# Altium PCB PCB3_factory.PcbDoc (part 1 of 3)
Units mil, origin at the board's own origin, x right, y up, seen from the top; angles counter-clockwise.
Board outline 1614.17 x 4094.49 mil, 2 copper layers (Top Layer, Bottom Layer); 17 components, 26 nets, 94 pads, 20 vias.
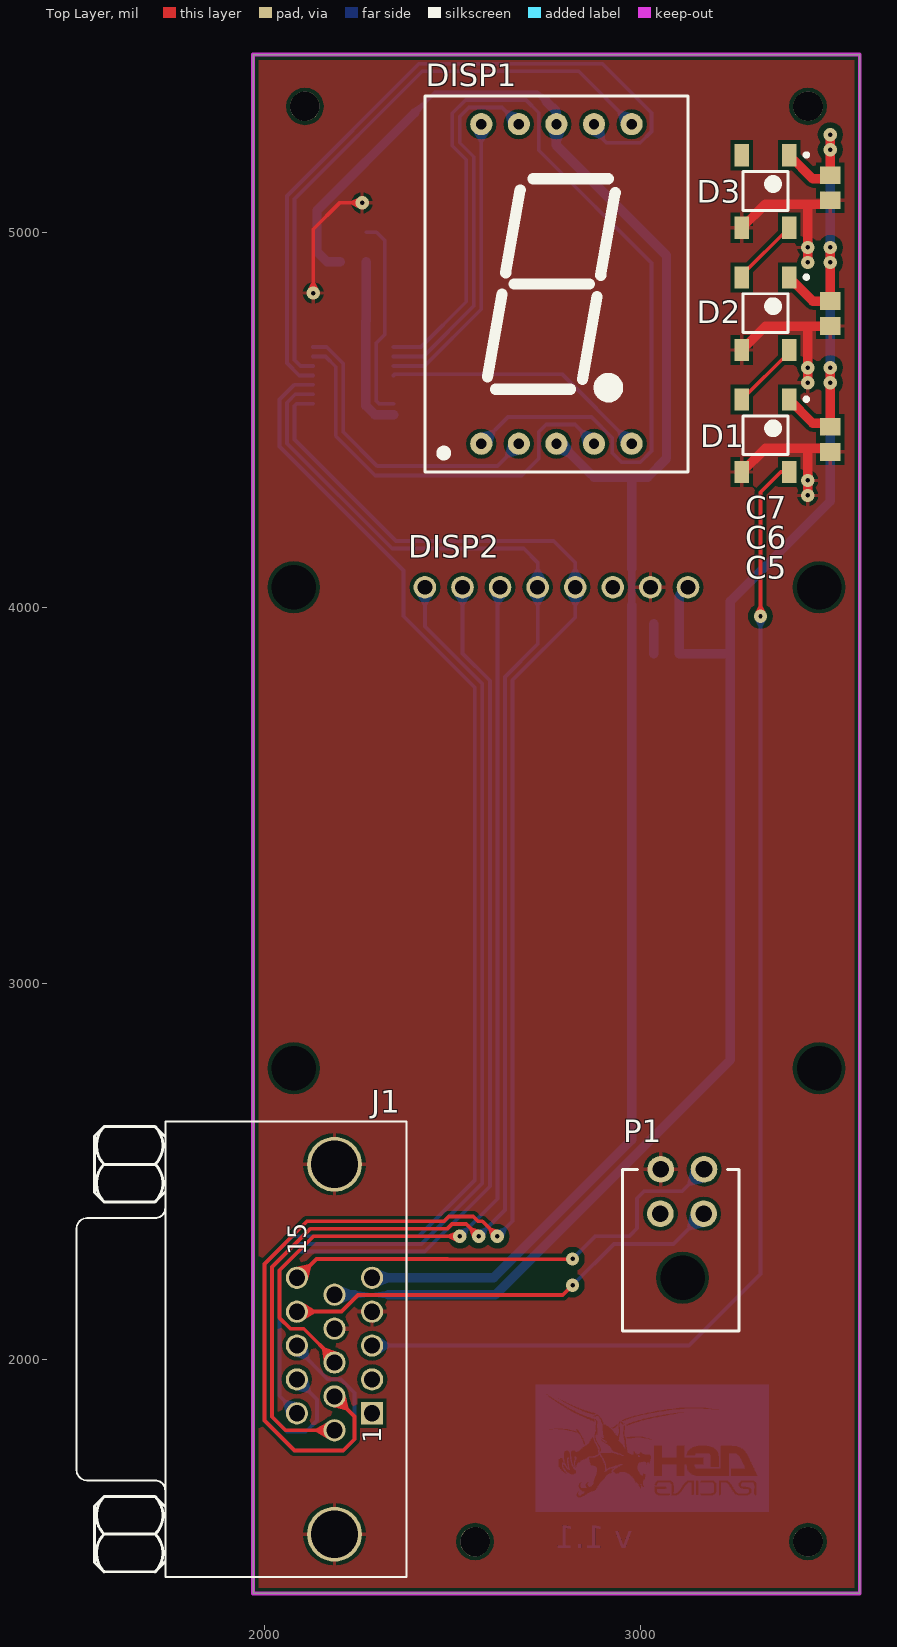
[diagram p0: Top Layer view]
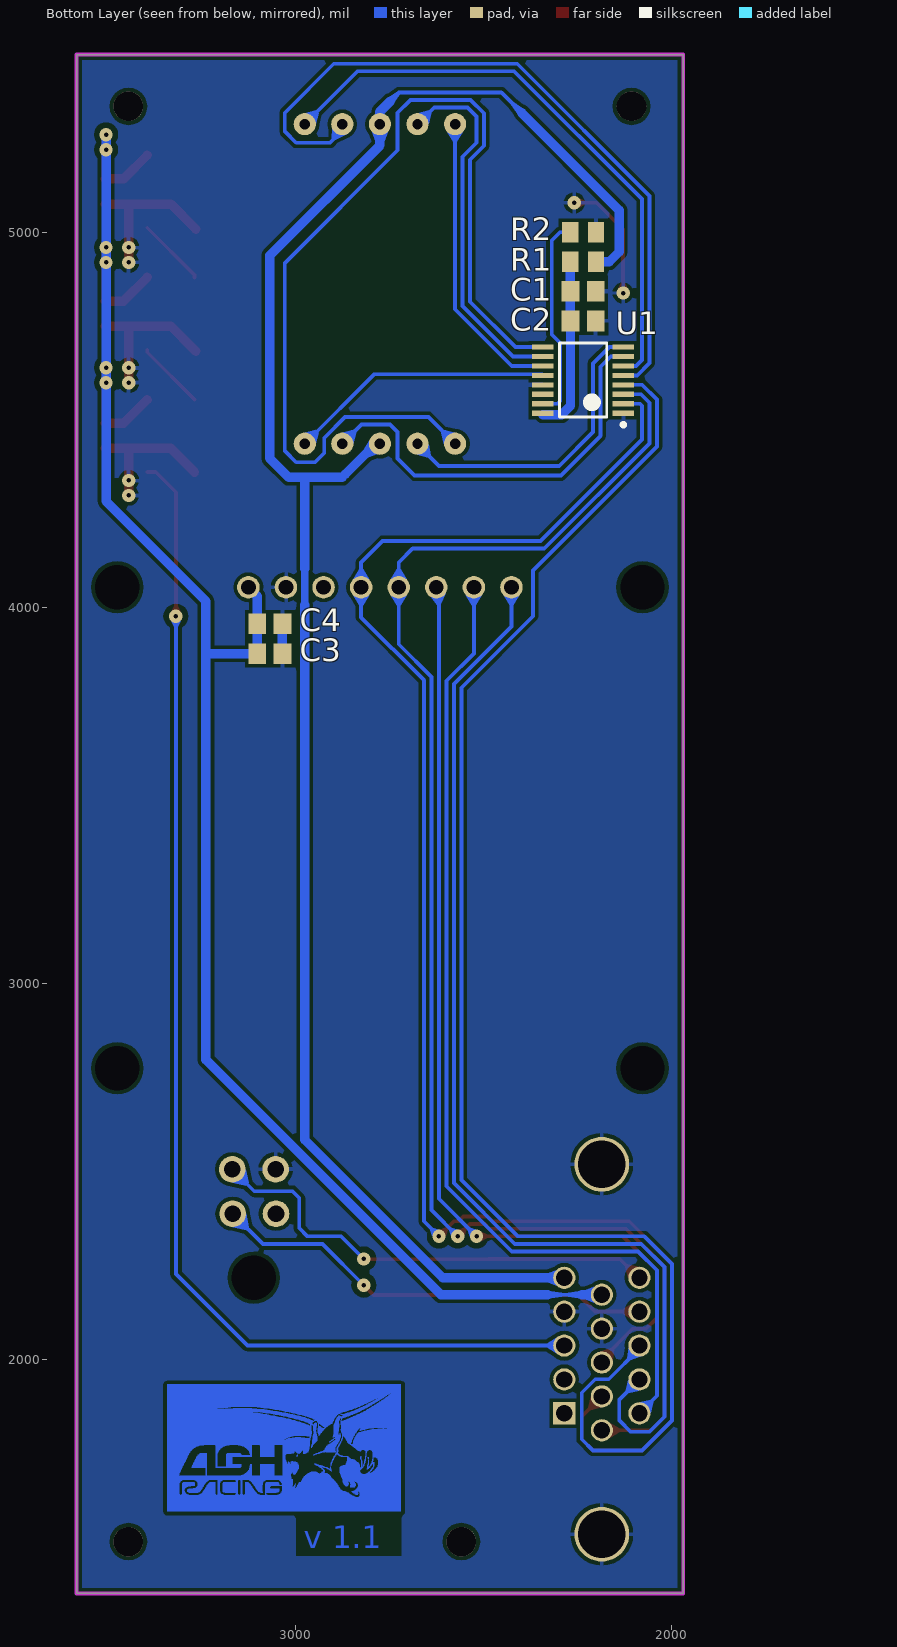
[diagram p1: Bottom Layer view, seen from below]
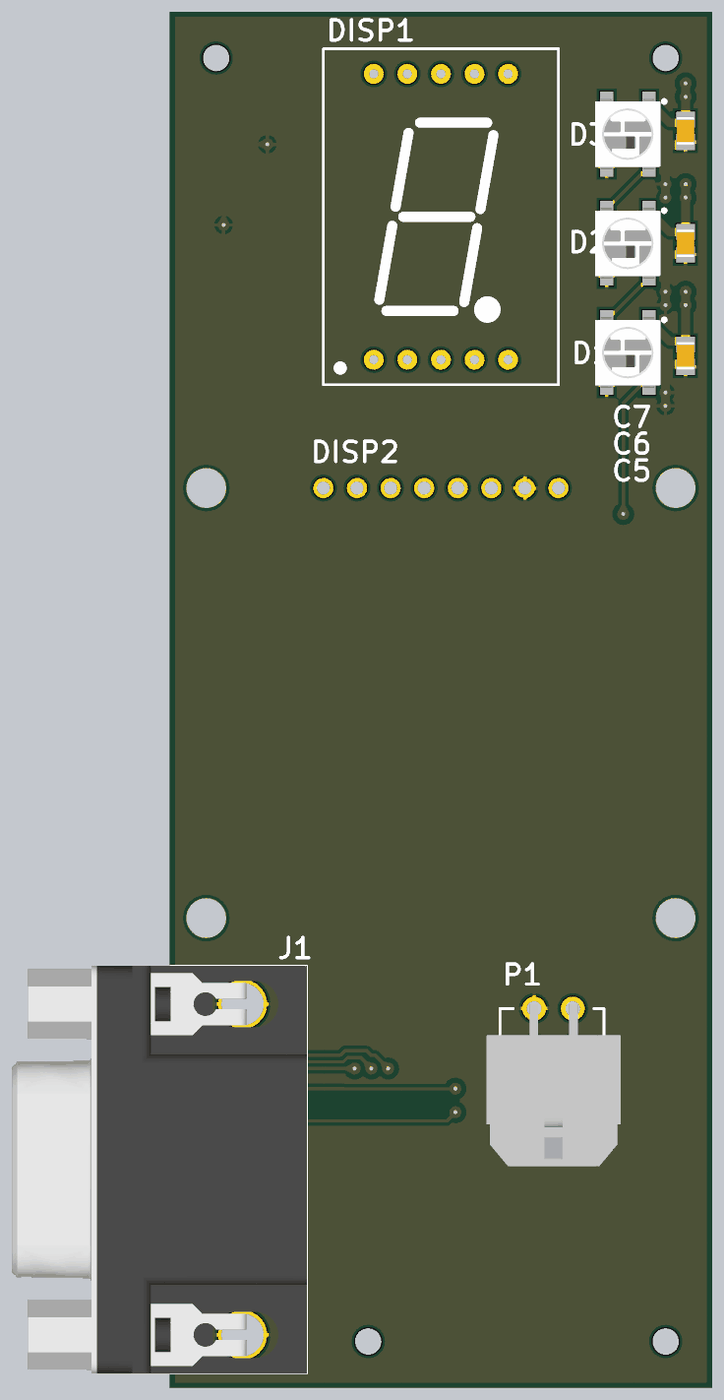
[diagram p4: 3D render of the assembled board from above, using the file's embedded part models]
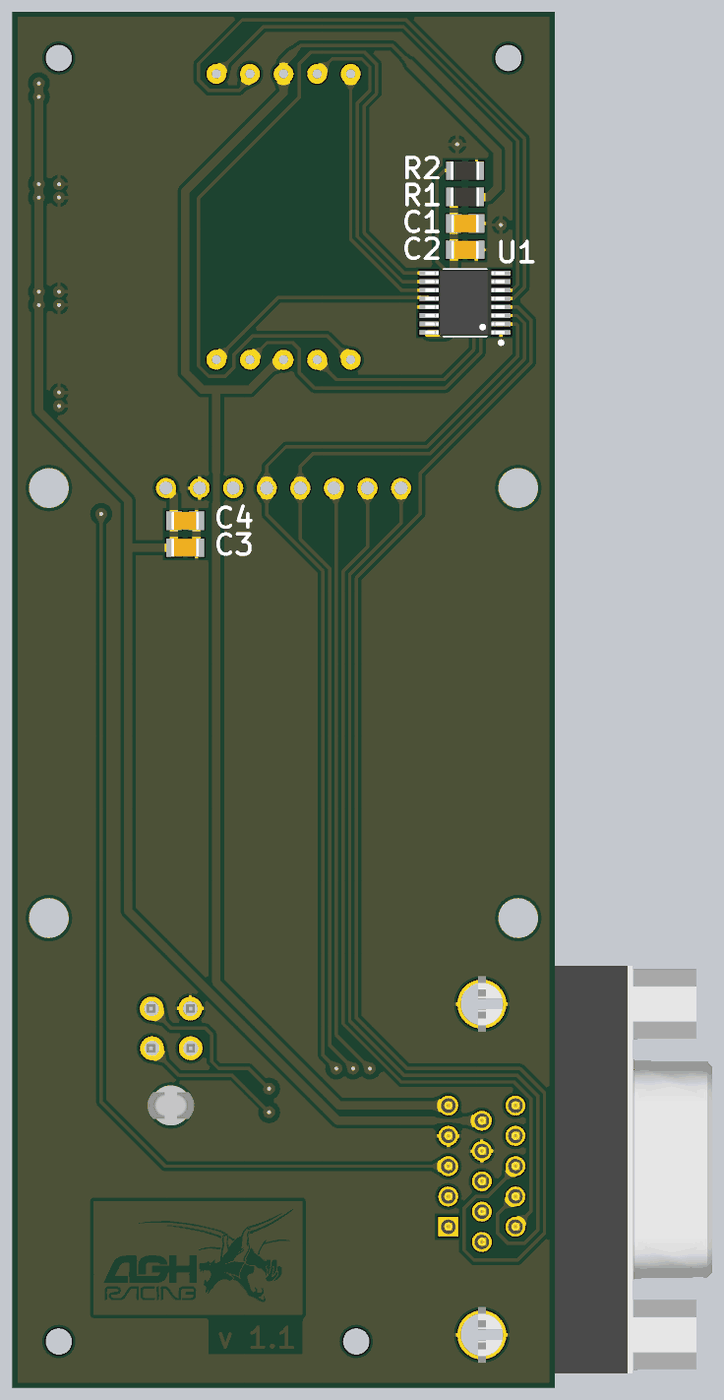
[diagram p5: 3D render of the assembled board from below, using the file's embedded part models]

## Layer stack, top to bottom
Top Solder: solder mask 0.4, Solder Resist, Dk 3.5
Top Layer: signal copper 1.4
Dielectric 1: dielectric 12.6, FR-4, Dk 4.8
Bottom Layer: signal copper 1.4
Bottom Solder: solder mask 0.4, Solder Resist, Dk 3.5

## Board outline
1968.5,1377.95 1968.5,5472.44 3582.68,5472.44 3582.68,1377.95

## Design rules (kind name [scope] priority, off if disabled: settings)
Clearance [All] p1: gap=10 except(15: Via-Poly)
PolygonConnect [All] p1: connectstyle=Relief reliefconductorwidth=10 reliefentries=4 polygonreliefangle="90 Angle" airgapwidth=10
RoomDefinition U_RGB [InComponentClass('U_RGB')] p1: confinementstyle=ConfineIn formatcopy=TRUE lockcomponents=FALSE outline 3564.13,4220.47 3564.13,5361.85 3208.66,5361.85 3208.66,4220.47
RoomDefinition Main [InComponentClass('Main')] p2: confinementstyle=ConfineIn formatcopy=TRUE lockcomponents=FALSE outline 1377.17,1377.95 3463.78,1377.95 3463.78,2707.24 1377.17,2707.24
RoomDefinition U_GearDisplay [InComponentClass('U_GearDisplay')] p3: confinementstyle=ConfineIn formatcopy=TRUE lockcomponents=FALSE outline 1984.25,4291.34 3188.98,4291.34 3188.98,5433.07 1984.25,5433.07
RoomDefinition U_OLED [InComponentClass('U_OLED')] p4: confinementstyle=ConfineIn formatcopy=TRUE lockcomponents=FALSE outline 1968.5,2559.06 3582.68,2559.06 3582.68,4212.6 1968.5,4212.6
RoutingVias [All] p1: holewidth=28 width=50 viastyle="Through Hole" minholewidth=28 minwidth=50 maxholewidth=28 maxwidth=50
SolderMaskExpansion [All] p1: expansion=4
Width "Schematic Width Constraint_3" [InNet('+3V3')] p1: maxlimit=30 minlimit=10 preferedwidth=25 toplayer_minwidth=20 minimp=50.000000 maximp=50.000000 favimp=50.000000
Width "Schematic Width Constraint_2" [InNet('NetC1_2')] p2: maxlimit=30 minlimit=20 preferedwidth=25 minimp=50.000000 maximp=50.000000 favimp=50.000000
Width "Schematic Width Constraint_1" [InNet('+5V')] p3: maxlimit=30 minlimit=10 preferedwidth=25 toplayer_minwidth=20 minimp=50.000000 maximp=50.000000 favimp=50.000000
Width "Schematic Width Constraint" [InNet('GND')] p4: maxlimit=30 minlimit=10 preferedwidth=25 minimp=50.000000 maximp=50.000000 favimp=50.000000
Width [InNet('No Net')] p5: maxlimit=10 minlimit=1 preferedwidth=1 minimp=50.000000 maximp=50.000000 favimp=50.000000
Width Width_1 [All] p6: maxlimit=10 minlimit=10 preferedwidth=10
30 further rules are at their usual default settings.

## Classes and differential pairs
component class U_RGB: C5 C6 C7 D1 D2 D3
component class U_OLED: C3 C4 DISP2
component class U_GearDisplay: C1 C2 DISP1 R1 R2 U1
component class Main: J1 P1

## Components (designator, comment, footprint, x,y, rotation, side; value= is the part's Value field where it differs from the comment)
C1 "Cap" CAP_0805_IPC_MD 2235.04,4842.52 r0 bottom
C2 "Cap" CAP_0805_IPC_MD 2235.04,4763.78 r0 bottom
C3 "Cap" CAP_0805_IPC_MD 3068.5,3877.95 r0 bottom
C4 "Cap" CAP_0805_IPC_MD 3068.5,3957.95 r0 bottom
C5 "Cap" CAP_0805_IPC_MD 3503.94,4448.82 r90 top locked
C6 "Cap" CAP_0805_IPC_MD 3503.94,4783.46 r90 top locked
C7 "Cap" CAP_0805_IPC_MD 3503.94,5118.11 r90 top locked
D1 "RGB LED" WS2812B 3331.85,4458.11 r270 top locked
D2 "RGB LED" WS2812B 3331.85,4783.11 r270 top locked
D3 "RGB LED" WS2812B 3331.85,5108.11 r270 top locked
DISP1 "7SEG DISP" 7_SEG_LED_0.8_INCH 2775.59,4862.2 r0 top locked
DISP2 "OLED" OLED_1.3_INCH 2775.59,4055.12 r0 top locked
J1 "D-SUB 15" Dsub-3H15 2185.04,2027.56 r90 top locked
P1 "MOLEX-4" MOLEX_4_PIN 3110.24,2362.2 r0 top locked
R1 "Res" RES_0805_IPC_MD 2235.04,4921.26 r0 bottom
R2 "Res" RES_0805_IPC_MD 2235.04,5000 r180 bottom
U1 "SCT2167" SSOP_16_IPC_MD 2235.04,4606.3 r0 bottom

## Footprints (in the part's own frame and the unit in brackets; to place one, negate y for a bottom-side part, rotate by r counter-clockwise, add the part's x,y. Pads: shape width x height; smd on the part's side, far side on the other; paste and mask are expansions set on the pad)
7_SEG_LED_0.8_INCH [mm] "OPTO PLUS LED CORP. OPD-S8023LB-BW"
  round 1.5 hole 0.7: 1(-5.08,-10.8) 2(-2.54,-10.8) 3(0,-10.8) 4(2.54,-10.8) 5(5.08,-10.8) 6(5.08,10.8) 7(2.54,10.8) 8(0,10.8) 9(-2.54,10.8) 10(-5.08,10.8)
  silkscreen extent -8.89,-12.7 8.89,12.7, body extent -10,-13.85 10,13.85, height 12.5
CAP_0805_IPC_MD [mm] "Chip Capacitor, 2-Leads, 0805, SAMSUNG, IPC Medium Density"
  rect 1.2x1.4 smd: 1(-0.85,0) 2(0.85,0)
  body extent -1.05,-0.67 1.05,0.68, height 1.35
Dsub-3H15 [mm] "Dsub 15 pins, right angled"
  rect 1.5x1.5 hole 1.1: 1(-4.33,-2.54)
  round 1.5 hole 1.1: 2(-2.04,-2.54) 3(0.25,-2.54) 4(2.54,-2.54) 5(4.83,-2.54) 6(-5.475,0) 7(-3.185,0) 8(-0.895,0) 9(1.395,0) 10(3.685,0) 11(-4.33,2.54) 12(-2.04,2.54) 13(0.25,2.54) 14(2.54,2.54) 15(4.83,2.54)
  round 3.7 hole 3.2: 16(12.5,0) 17(-12.5,0)
  silkscreen extent -15.4,-4.87 15.4,17.43, body extent -15.4,-4.86 15.4,17.44, height 12.51
MOLEX_4_PIN [mm]
  round 1.8 hole 1.12: 1(1.45,0.66) 2(1.475,3.66) 3(-1.475,0.66) 4(-1.45,3.66)
  round 0 hole 3: ""(0.025,-3.66)
  silkscreen extent -4.04,-7.26 3.84,3.66, body extent -5.05,-8.26 5.1,3.98, height 8.77
OLED_1.3_INCH [mm]
  round 1.524 hole 1: 1(8.89,0) 2(6.35,0) 3(3.81,0) 4(1.27,0) 5(-1.27,0) 6(-3.81,0) 7(-6.35,0) 8(-8.89,0)
  round 0 hole 3: ""(-17.75,-32.5) ""(-17.75,0) ""(17.75,-32.5) ""(17.75,0)
  body extent -20.25,-35 20.25,2.5, height 12.5
RES_0805_IPC_MD [mm] "Chip Resistor, 2-Leads, 0805, Royal Ohm, IPC Medium Density"
  rect 1.1x1.4 smd: 1(-0.875,0) 2(0.875,0)
  body extent -1.08,-0.7 1.07,0.7, height 0.65
SSOP_16_IPC_MD [mm] "SSOP, 16-Leads, Pitch 0,64mm, IPC Medium Density"
  rect 1.45x0.35 smd mask+0.145: 1(-2.725,2.24) 2(-2.725,1.6) 3(-2.725,0.96) 4(-2.725,0.32) 5(-2.725,-0.32) 6(-2.725,-0.96) 7(-2.725,-1.6) 8(-2.725,-2.24) 9(2.725,-2.24) 10(2.725,-1.6) 11(2.725,-0.96) 12(2.725,-0.32) 13(2.725,0.32) 14(2.725,0.96) 15(2.725,1.6) 16(2.725,2.24)
  silkscreen extent -2.85,-2.5 1.6,3.14, body extent -3,-2.5 3,2.5, height 1.75
WS2812B [mm]
  rect 1.5x1 smd: 1(-2.45,1.6) 2(-2.45,-1.6) 3(2.45,-1.6) 4(2.45,1.6)
  silkscreen extent -2.6,-1.52 1.27,2.89, body extent -2.68,-2.48 2.68,2.47, height 1.7

## Part data
C1 C2 C3 C4 C5 C6 C7: "Capacitor"
D1 D2 D3: "Programmable RGB LED"
DISP1: "OPTO PLUS LED CORP. OPD-S8023LB-BW"
J1: "Receptacle Assembly, 15-Pin, Sim Line Connector"
P1: "4 pin socket"
R1 R2: "Resistor"
U1: "Led controller"

## Free pads (board coordinates)
  round 78.74 hole 78.74 unplated: ""(2106.3,5334.65) ""(2559.05,1515.75) ""(3444.88,1515.75) ""(3444.88,5334.65)

## Via types
v1: diameter 35.43/35.43 (per signal layer), hole 11.81, Top Layer to Bottom Layer, tented both sides, 20 vias

## Nets (pads, with @x,y where several pads share a name; then routed paths per layer and width w, separated by ;. In a path a pad name is that pad's centre, name@x,y a point inside that pad or via, vN(x,y) a via of type N, cw(c..) or ccw(c..) an arc to the next point about the centre after c; other vN are vias at no path point)
+3V3: C3.2 C4.2 C5.2 C6.2 C7.2 D1.1 D2.1 D3.1 DISP2.1 J1.10 | length 5024.2
  Top Layer w25: J1.10@2185.04,2170.66 J1.10@2186.33,2169.37 ; D1.1@3394.84,4554.57 3457.83,4491.57 C5.2@3506.85,4491.57 ; D2.1@3394.84,4879.57 3457.83,4816.57 C6.2@3506.85,4816.57 ; D3.1@3394.84,5204.57 3457.83,5141.57 C7.2@3506.85,5141.57 ; C5.2@3504.25,4494.17 v1(3504.25,4599.37) v1(3504.25,4639.37) ; C6.2@3504.25,4819.17 v1(3504.25,4919.37) v1(3504.25,4959.37) ; C7.2@3504.25,5144.17 v1(3504.25,5219.37) v1(3504.25,5259.37)
  Bottom Layer w10: 2238.51,2172.64 2328.5,2172.64
  Bottom Layer w20: 3504.25,4338.35 3504.25,4339.37
  Bottom Layer w25: J1.10@2185.04,2172.63 2238.5,2172.63 ; 2328.5,2172.64 2613.19,2172.64 3238.5,2797.95 3238.5,4017.95 3504.25,4283.7 3504.25,4338.35 ; DISP2.1@3125.59,4055.12 3101.97,4031.5 C4.2@3101.97,3957.95 C3.2@3101.97,3877.95 3238.5,3877.95 ; 3504.25,4339.37 v1(3504.25,4599.37) v1(3504.25,4639.37) v1(3504.25,4919.37) v1(3504.25,4959.37) v1(3504.25,5219.37) v1(3504.25,5259.37)
+5V: DISP1.3 DISP1.8 J1.5 R1.1 | length 4977
  Top Layer w25: DISP1.8@2764.25,5287.4 DISP1.8@2780.4,5287.4
  Bottom Layer w10: 2398.5,5317.95 2452.48,5371.93 2724.53,5371.93 2748.5,5347.95
  Bottom Layer w20: 2975.59,4007.95 2975.59,4104.74
  Bottom Layer w25: R1.1@2200.59,4921.26 2165.2,4921.26 2138.5,4947.95 2138.5,5057.95 2398.5,5317.95 ; J1.5@2285.04,2217.72 2608.27,2217.72 2975.59,2585.04 2975.59,4007.95 ; 2748.5,5347.95 2775.59,5320.87 DISP1.8@2775.59,5287.4 2775.59,5230.87 3068.5,4937.95 3068.5,4397.95 3018.5,4347.95 2875.59,4347.95 ; DISP1.3@2775.59,4437.01 2786.54,4437.01 2867.84,4355.7 ; 2975.59,4104.74 2975.59,4347.95
BUT_1: J1.14 P1.1 | length 1213.9
  Top Layer w10: J1.14@2085.04,2128.11 2203.48,2128.11 2247.46,2172.08 2792.63,2172.08 v1(2818.5,2197.95)
  Bottom Layer w10: J1.14@2085.04,2127.55 J1.14@2108.9,2127.55 ; v1(2818.5,2197.95) 2928.5,2307.95 3087.09,2307.95 P1.1@3167.32,2388.19
BUT_2: J1.15 P1.2 | length 1285
  Top Layer w10: J1.15@2085.04,2198.58 2085.04,2215.74 2137.25,2267.95 2485.78,2267.95 2486.45,2267.28 2817.83,2267.28 v1(2818.5,2267.95)
  Bottom Layer w10: J1.15@2085.04,2217.71 J1.15@2085.04,2234.49 ; v1(2818.5,2267.95) 2878.5,2327.95 2968.5,2327.95 2989.96,2349.41 2989.96,2429.41 3008.5,2447.95 3109.96,2447.95 P1.2@3168.31,2506.3
GDISP_CS: J1.13 U1.4 | length 4091.2
  Top Layer w10: J1.13@2083.46,2015.75 J1.13@2083.46,2019.76
  Bottom Layer w10: J1.13@2083.93,2035.43 J1.13@2085.04,2035.43 ; J1.13@2085.04,2037.4 J1.13@2085.04,2035.43 ; U1.4@2127.76,4593.7 2077.68,4593.7 2038.5,4554.52 2038.5,4429.67 2368.5,4099.67 2368.5,3977.95 2558.5,3787.95 2558.5,2477.95 2408.5,2327.95 2071.94,2327.95 1998.5,2254.52 1998.5,1837.95 2078.5,1757.95 2208.5,1757.95 2238.5,1787.95 2238.5,1911.67 2202.38,1947.8 2166.6,1947.8 2085.04,2029.35 J1.13@2085.04,2035.43
GND: C1.1 C2.1 C3.1 C4.1 C5.1 C6.1 C7.1 D1.3 D2.3 D3.3 DISP2.2 J1.4 J1.9 J1.16 J1.17 P1.4 R2.2 U1.1 U1.13 | length 1644.1
  Top Layer w10: v1(2128.5,4837.95) 2128.5,5007.95 2198.5,5077.95 v1(2258.5,5077.95)
  Top Layer w25: D2.3@3265.39,4683.19 D2.3@3268.86,4686.65 3331.85,4749.65 3446.02,4749.65 ; D3.3@3265.39,5008.19 D3.3@3268.86,5011.65 3331.85,5074.65 3446.02,5074.65 ; D1.3@3268.86,4361.65 3331.85,4424.65 3446.02,4424.65 ; v1(3444.25,4299.37) 3444.25,4422.87 3446.02,4424.65 ; v1(3444.25,4599.37) 3444.25,4747.87 3446.02,4749.65 ; v1(3444.25,4919.37) 3444.25,5072.87 3446.02,5074.65 ; C5.1@3506.85,4424.65 3446.02,4424.65 ; C6.1@3506.85,4749.65 3446.02,4749.65 ; C7.1@3506.85,5074.65 3446.02,5074.65
  Bottom Layer w25: C3.1@3035.04,3877.95 C4.1@3035.04,3957.95
  other v1: 3444.25,4339.37 3444.25,4639.37 3444.25,4959.37
NetC1_2: C1.2 C2.2 R1.2 U1.16 | length 467.5
  Bottom Layer w25: R1.2@2269.49,4921.26 2269.49,4764.76 C2.2@2268.5,4763.78 2268.5,4537.95 2292.54,4513.92 U1.16@2342.32,4513.92
NetD1_2: D1.2 D2.4 | length 184.3
  Top Layer w10: D1.2@3268.86,4554.57 3394.84,4680.55 D2.4@3394.84,4686.65
NetD2_2: D2.2 D3.4 | length 184.3
  Top Layer w10: D2.2@3268.86,4879.57 3268.86,4885.67 D3.4@3394.84,5011.65
NetD3_2: D3.2
NetDISP1_1: DISP1.1 U1.9 | length 2610.7
  Bottom Layer w10: U1.9@2342.32,4694.49 2415.04,4694.49 2535.59,4815.04 2535.59,5192.58 2498.5,5229.67 2498.5,5316.24 2534.2,5351.93 2694.53,5351.93 2728.5,5317.95 2728.5,5217.95 3028.5,4917.95 3028.5,4417.95 2998.5,4387.95 2948.5,4387.95 2923.95,4412.51 2923.95,4452.51 2868.5,4507.95 2646.54,4507.95 DISP1.1@2575.59,4437.01
NetDISP1_2: DISP1.2 U1.8 | length 811.4
  Bottom Layer w10: U1.8@2127.76,4694.49 2164.39,4694.49 2208.5,4650.37 2208.5,4467.95 2298.5,4377.95 2618.5,4377.95 2675.59,4435.04 DISP1.2@2675.59,4437.01
NetDISP1_4: DISP1.4 U1.7 | length 1104.9
  Bottom Layer w10: U1.7@2127.76,4669.29 2161.3,4669.29 2188.5,4642.09 2188.5,4457.95 2293.7,4352.76 2683.31,4352.76 2728.5,4397.95 2728.5,4467.95 2748.5,4487.95 2824.65,4487.95 DISP1.4@2875.59,4437.01
NetDISP1_5: DISP1.5 U1.12 | length 711.3
  Bottom Layer w10: U1.12@2342.32,4618.9 2345.63,4622.2 2790.39,4622.2 DISP1.5@2975.59,4437.01
NetDISP1_6: DISP1.6 U1.6 | length 1580
  Bottom Layer w10: U1.6@2127.76,4644.09 2094.21,4644.09 2078.5,4659.8 2078.5,5087.95 2418.5,5427.95 2835.04,5427.95 DISP1.6@2975.59,5287.4
NetDISP1_7: DISP1.7 U1.5 | length 1942.5
  Bottom Layer w10: U1.5@2127.76,4618.9 2091.13,4618.9 2058.5,4651.52 2058.5,5096.24 2410.22,5447.95 2898.5,5447.95 3028.5,5317.95 3028.5,5267.95 2998.5,5237.95 2908.5,5237.95 2875.59,5270.87 DISP1.7@2875.59,5287.4
NetDISP1_9: DISP1.9 U1.10 | length 974.2
  Bottom Layer w10: U1.10@2342.32,4669.29 2421.56,4669.29 2555.59,4803.32 2555.59,5200.87 2518.5,5237.95 2518.5,5307.95 2542.48,5331.93 2631.06,5331.93 DISP1.9@2675.59,5287.4
NetDISP1_10: DISP1.10 U1.11 | length 788.2
  Bottom Layer w10: U1.11@2342.32,4644.09 2424.65,4644.09 2575.59,4795.04 DISP1.10@2575.59,5287.4
NetR2_1: R2.1 U1.15 | length 544.2
  Bottom Layer w10: R2.1@2269.49,5000 2296.46,5000 2318.5,4977.95 2318.5,4727.95 2296,4705.45 2296,4550.45 2303.15,4543.31 U1.15@2342.32,4543.31
NetU1_14: U1.14
OLED_CS: DISP2.6 J1.8 | length 2616.1
  Top Layer w10: J1.8@2185.04,1992.32 2185.04,2000.37 2103.48,2081.93 2067.69,2081.93 2038.5,2111.12 2038.5,2237.95 2128.5,2327.95 v1(2518.5,2327.95)
  Bottom Layer w10: v1(2518.5,2327.95) 2618.5,2427.95 2618.5,4048.03 DISP2.6@2625.59,4055.12
OLED_DC: DISP2.7 J1.11 | length 2676.6
  Bottom Layer w10: J1.11@2085.04,1857.08 2038.5,1903.62 2038.5,2237.95 2088.5,2287.95 2425.07,2287.95 2598.5,2461.38 2598.5,3806.24 2525.59,3879.15 DISP2.7@2525.59,4055.12
OLED_MOSI: DISP2.4 J1.7 U1.2 | length 4435.3
  Top Layer w10: J1.7@2185.04,1902.16 2238.5,1848.7 2238.5,1787.95 2208.5,1757.95 2078.5,1757.95 1998.5,1837.95 1998.5,2254.52 2111.94,2367.95 2476.38,2367.95 2489.1,2380.67 2554.07,2380.67 2566.79,2367.95 2578.5,2367.95 v1(2618.5,2327.95)
  Bottom Layer w10: U1.2@2127.76,4543.31 2083.86,4543.31 2078.5,4537.95 2078.5,4447.95 2348.5,4177.95 2768.5,4177.95 2825.59,4120.87 DISP2.4@2825.59,4055.12 2825.59,3975.04 2658.5,3807.95 2658.5,2367.95 v1(2618.5,2327.95)
OLED_RST: DISP2.8 J1.12 | length 2980.1
  Bottom Layer w10: J1.12@2085.04,1947.24 2138.5,1893.78 2138.5,1837.95 2108.5,1807.95 2058.5,1807.95 2018.5,1847.95 2018.5,2246.24 2080.22,2307.95 2416.79,2307.95 2578.5,2469.67 2578.5,3797.95 2425.59,3950.87 DISP2.8@2425.59,4055.12
OLED_SCK: DISP2.5 J1.6 U1.3 | length 4033.8
  Top Layer w10: J1.6@2185.04,1812 2054.45,1812 2018.5,1847.95 2018.5,2246.24 2120.22,2347.95 2484.66,2347.95 2497.38,2360.67 2535.79,2360.67 v1(2568.5,2327.95)
  Bottom Layer w10: U1.3@2127.76,4568.5 2080.77,4568.5 2058.5,4546.24 2058.5,4437.95 2338.5,4157.95 2688.5,4157.95 2725.59,4120.87 DISP2.5@2725.59,4055.12 2725.59,3903.32 2638.5,3816.24 2638.5,2397.95 v1(2568.5,2327.95)
RGB: D1.4 J1.3 | length 3336.9
  Top Layer w10: J1.3@2283.46,2015.75 2303.15,2035.43 J1.3@2285.04,2035.43 ; v1(3318.5,3977.95) 3318.5,4307.95 3372.2,4361.65 D1.4@3394.84,4361.65
  Bottom Layer w10: J1.3@2285.04,2037.4 3127.95,2037.4 3318.5,2227.95 v1(3318.5,3977.95)
pads on no net: DISP2. DISP2.3 J1.1 J1.2 P1. P1.3
copper on no net: | length 166906